# Altium PCB npm1300_qeaa_config3.PcbDoc
Units mm, origin at the board's own origin, x right, y up, seen from the top; angles counter-clockwise.
Board outline 16.75 x 14 mm, 4 copper layers (Top Layer, Mid-Layer 1, Mid-Layer 2, Bottom Layer), stack 1.592 mm thick; 8 components, 15 nets, 47 pads, 52 vias.
Unrouted connection lines stored in the file: 20.
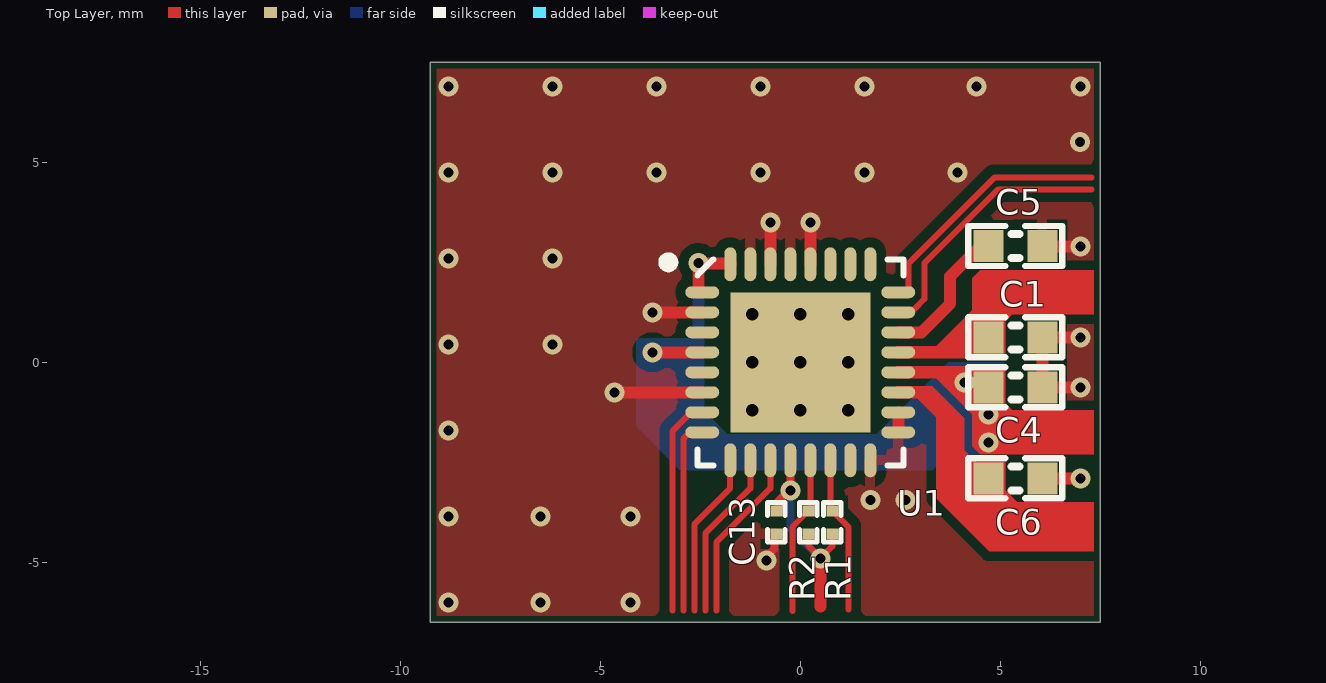
[diagram p0: Top Layer view]
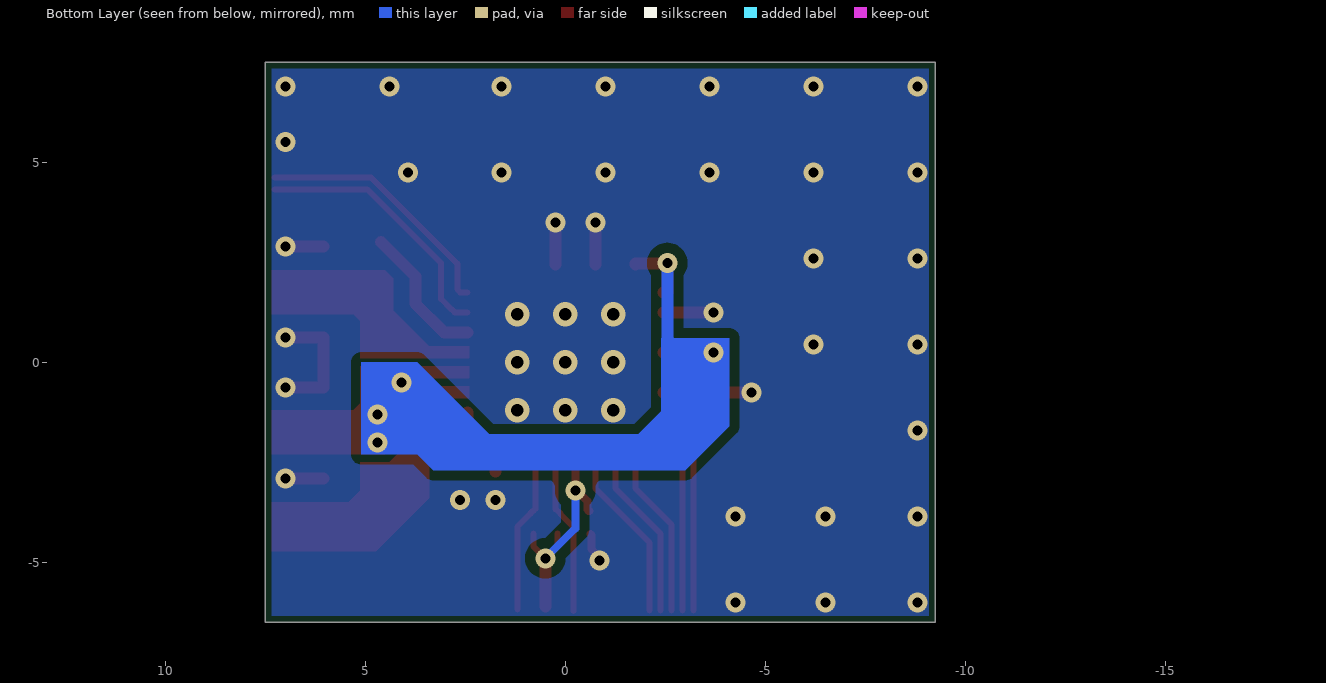
[diagram p1: Bottom Layer view, seen from below]
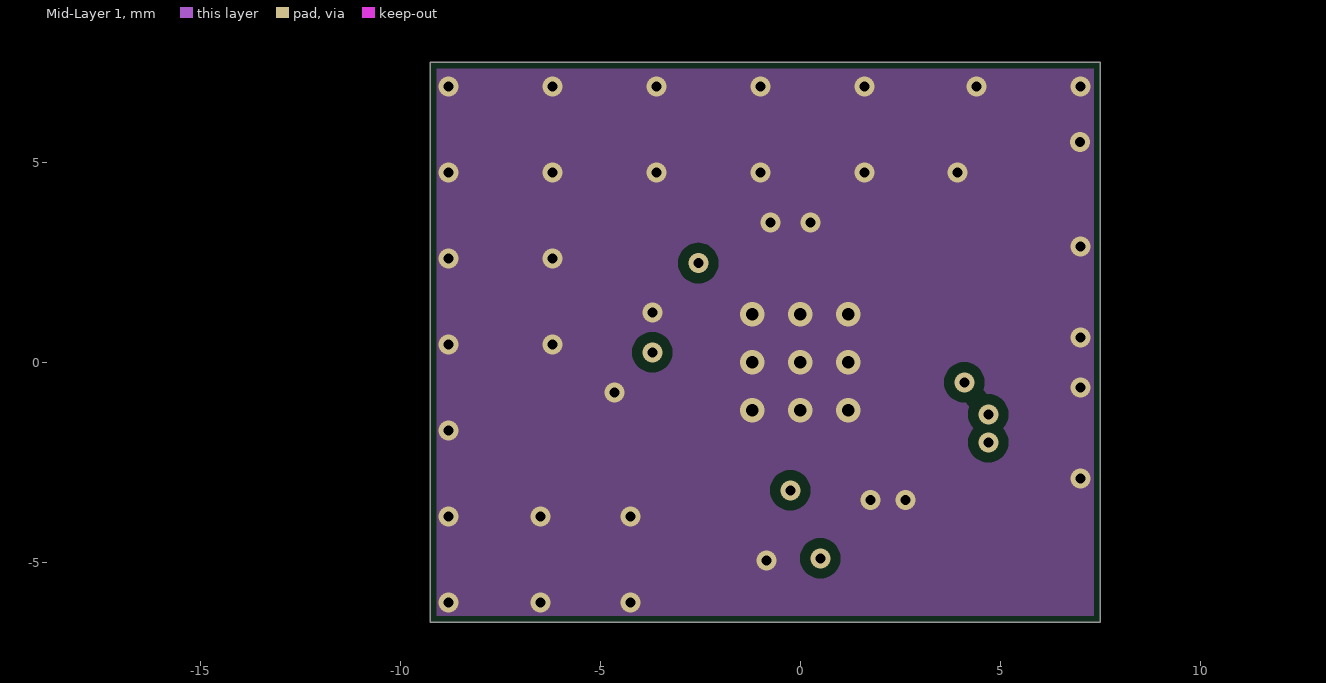
[diagram p2: Mid-Layer 1]
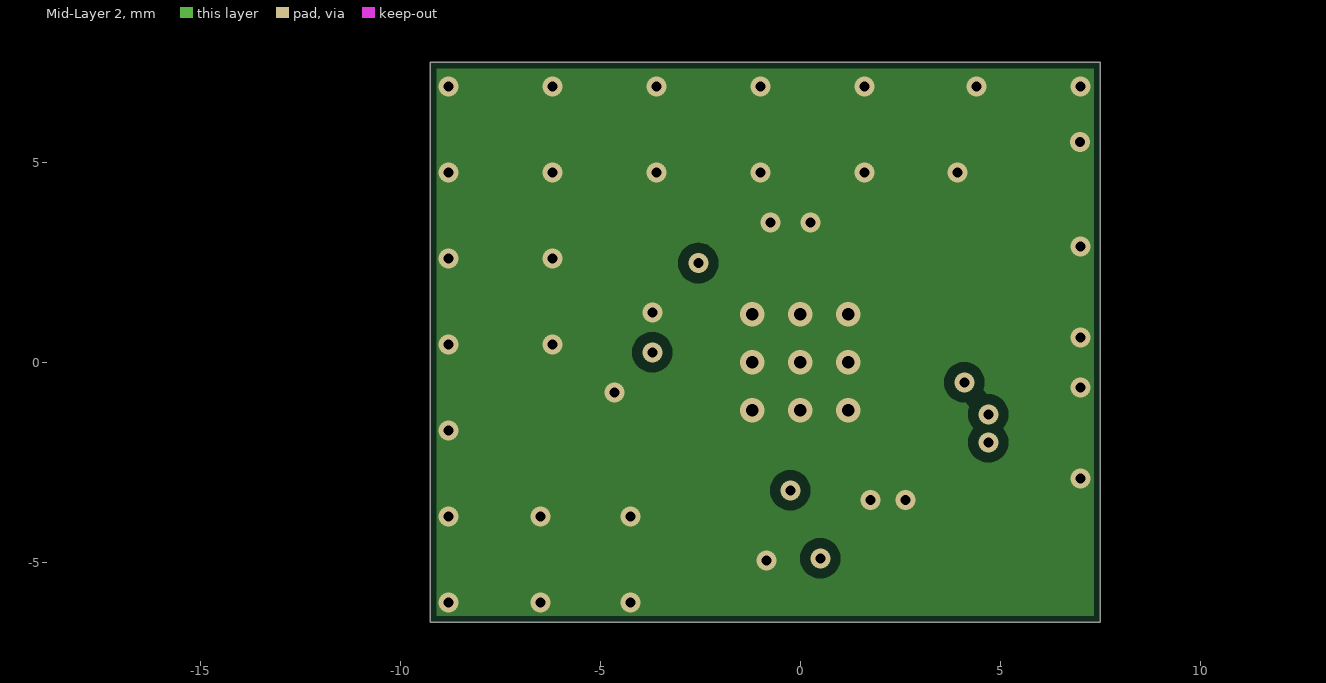
[diagram p3: Mid-Layer 2]
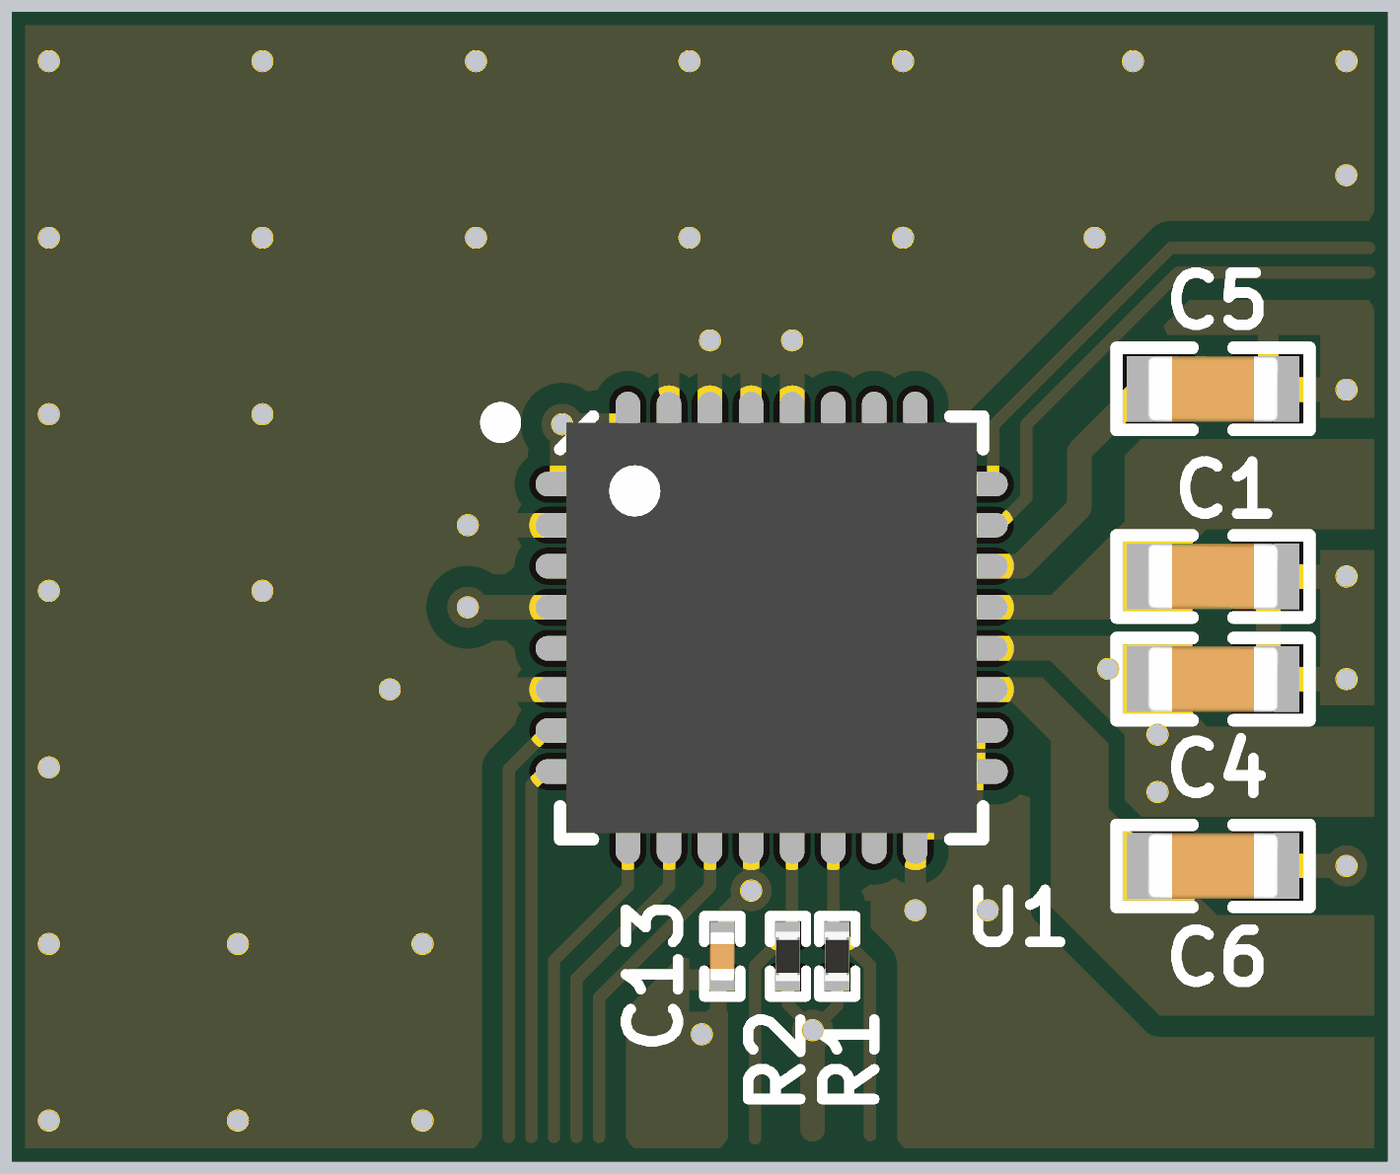
[diagram p4: 3D render of the assembled board from above, using the file's embedded part models]

## Layer stack, top to bottom
Top Solder: solder mask 0.0102, Solder Resist, Dk 3.5
Top Layer: signal copper 0.0356
Dielectric1: prepreg 0.075, FR-4, Dk 4.8
Mid-Layer 1: signal copper 0.0356
Dielectric2: core 1.3, FR-4, Dk 4.8
Mid-Layer 2: signal copper 0.0356
Dielectric 2: prepreg 0.075, FR-4, Dk 4.8
Bottom Layer: signal copper 0.0356
Bottom Solder: solder mask 0.0102, Solder Resist, Dk 3.5

## Board outline
-9.25,7.5 -9.25,-6.5 7.5,-6.5 7.5,7.5

## Design rules (kind name [scope] priority, off if disabled: settings)
BoardOutlineClearance [All] p1: gap=0.15 ignorepadtopadclearanceinfootprint=FALSE
Clearance Polygon_Clearance [(InNamedPolygon('Top_Layer-GND')) or (InNamedPolygon('Bottom_Layer-GND')) or (InNamedPolygon('Mid_Layer_1-GND')) or (InNamedPolygon('Mid_Layer_2-GND'))] p1: gap=0.254 ignorepadtopadclearanceinfootprint=FALSE except(0: Arc-Hole Track-Hole SMDPad-Hole THPad-Hole Via-Hole Fill-Hole Poly-Hole Region-Hole Text-Hole)
Clearance Clearance_Microvia [AsMM(ViaDiameter) = 0.3 vs AsMM(ViaDiameter) = 0.3] p2: gap=0.1 ignorepadtopadclearanceinfootprint=FALSE except(0: Arc-Hole Track-Hole)
Clearance ANT_Clerance [InNet('ANT')] p3: gap=0.127 ignorepadtopadclearanceinfootprint=FALSE except(0: Arc-Hole Track-Hole SMDPad-Hole THPad-Hole Via-Hole Fill-Hole Poly-Hole Region-Hole Text-Hole)
Clearance [All] p4: gap=0.125 ignorepadtopadclearanceinfootprint=FALSE
ComponentClearance [All] p1 off: gap=0.254 collisioncheckmode=3 verticalgap=0.254 showdistances=FALSE
DiffPairsRouting [All] p1: maxlimit=0.15 minlimit=0.127 mostfreqgap=0.15 toplayer_mingap=0.15 toplayer_minwidth=0.15 toplayer_maxwidth=0.15 toplayer_prefwidth=0.15 bottomlayer_mingap=0.15 bottomlayer_minwidth=0.15 bottomlayer_maxwidth=0.15 bottomlayer_prefwidth=0.15 impedanceprofiledriven=TRUE impedanceprofileid={DBD80B30-E3CF-4860-A6C7-45E32F93C55D} impedanceprofilevalue=90.000000 maxuncoupledlength=12.7
FabricationTestPointUsage TestPointUsage [All] p1: valid=0 allowmultiple=FALSE
FabricationTestpoint Testpoint [All] p1: side=3 testpointundercomponent=TRUE minsize=1.016 maxsize=2.54 preferedsize=1.524 minholesize=0 maxholesize=1.016 preferedholesize=0.813 testpointgrid=0.025 allowsidetop=TRUE allowsidebottom=TRUE usegrid=TRUE gridtolerance=0
Height [All] p1 off: minheight=0 maxheight=25.4 prefheight=12.7
HoleSize [All] p1: absolutevalues=TRUE maxlimit=5 minlimit=0.1 maxpercent=80.000 minpercent=20.000
MinimumAnnularRing [All] p1 off: minimumring=0.75
PolygonConnect PolygonConnect_GND [InNet('GND')] p1: thpad.connectstyle=Relief thpad.reliefconductorwidth=0.254 thpad.reliefentries=4 thpad.polygonreliefangle="90 Angle" thpad.airgapwidth=0.254 smdpad.connectstyle=Relief smdpad.reliefconductorwidth=0.254 smdpad.reliefentries=4 smdpad.polygonreliefangle="90 Angle" smdpad.airgapwidth=0.254 via.connectstyle=Direct via.reliefconductorwidth=0.254 via.reliefentries=4 via.polygonreliefangle="90 Angle" via.airgapwidth=0.254
PolygonConnect [All] p2: connectstyle=Direct reliefconductorwidth=0.254 reliefentries=4 polygonreliefangle="90 Angle" airgapwidth=0.254
RoutingVias [All] p1: holewidth=0.305 width=0.61 viastyle="Through Hole" minholewidth=0.305 minwidth=0.61 maxholewidth=0.711 maxwidth=1.27 useviatemplates=TRUE viatemplateguid#1={6F225C6A-EE86-4657-A426-C9A0349870D4} viatemplatename#1=v50h25m0mx0
ShortCircuit ShortCircuit_PVSS [InNet('PVSS1') or InNet('PVSS2') vs InNet('GND')] p1: allowed=TRUE
ShortCircuit [All] p2: allowed=FALSE
SilkToSolderMaskClearance SilkscreenOverComponentPads [IsPad] p1: minsilkscreentomaskgap=0.254 clearancetoexposedcopper=TRUE
SolderMaskExpansion SolderMaskExpansion_Vias [IsVia] p1: expansion=0.102 istentingtop=TRUE
SolderMaskExpansion [All] p2: expansion=0.076 istentingtop=FALSE
SupplyNets "Schematic Supply Nets_4" [InNet('VBAT')] p1: voltage=0.000
SupplyNets "Schematic Supply Nets_3" [InNet('GND')] p2: voltage=0.000
SupplyNets "Schematic Supply Nets_2" [InNet('VSYS')] p3: voltage=0.000
SupplyNets "Schematic Supply Nets_1" [InNet('VDDIO')] p4: voltage=0.000
SupplyNets "Schematic Supply Nets" [InNet('VBUSIN')] p5: voltage=0.000
UnRoutedNet [All] p1: checkbadconnections=TRUE
Width [All] p1: maxlimit=2 minlimit=0.12 preferedwidth=0.3
21 further rules are at their usual default settings.

## Components (designator, comment, footprint, x,y, rotation, side; value= is the part's Value field where it differs from the comment)
C1 "1.0µF" CAPC1608X06L 5.375,0.625 r180 top
C4 "10µF" CAPC1608X06L 5.375,-0.625 r180 top
C5 "1.0µF" CAPC1608X06L 5.375,2.91 r180 top
C6 "2.2µF" CAPC1608X06L 5.375,-2.9 r180 top
C13 "100nF" CAPC0603X03L_C -0.6,-4 r270 top
R1 "10k" RESC0603X03L_C 0.8,-4 r270 top
R2 "10k" RESC0603X03L_C 0.2,-4 r270 top
U1 "nPM1300-QEAA" Nordic_QFN50P500X500X90-33N 0,0 r0 top locked

## Footprints (in the part's own frame and the unit in brackets; to place one, negate y for a bottom-side part, rotate by r counter-clockwise, add the part's x,y. Pads: shape width x height; smd on the part's side, far side on the other; paste and mask are expansions set on the pad)
CAPC0603X03L_C [mm] "Chip Capacitor, 2-Leads, Body 0.6x0.3mm, IPC High Density"
  rect 0.27x0.3 smd mask+0.05: 1(-0.285,0) 2(0.285,0)
  silkscreen extent -0.49,-0.22 0.49,0.22, body extent -0.3,-0.15 0.3,0.15, height 0.3
CAPC1608X06L [mm] "Chip Capacitor, 2-Leads, Body 1.6x0.8mm, IPC High Density"
  rect 0.75x0.8 smd: 1(-0.675,0) 2(0.675,0)
  silkscreen extent -1.17,-0.5 1.17,0.5, body extent -0.8,-0.4 0.8,0.4, height 0.8
Nordic_QFN50P500X500X90-33N [mm] "QFN32 5x5x0.85mm, 0.5mm pitch - Medium Density"
  oval 0.85x0.3 smd mask+0.076: 1(-2.45,1.75) 2(-2.45,1.25) 3(-2.45,0.75) 4(-2.45,0.25) 5(-2.45,-0.25) 6(-2.45,-0.75) 7(-2.45,-1.25) 8(-2.45,-1.75) 17(2.45,-1.75) 18(2.45,-1.25) 19(2.45,-0.75) 20(2.45,-0.25) 21(2.45,0.25) 22(2.45,0.75) 23(2.45,1.25) 24(2.45,1.75)
  oval 0.3x0.85 smd mask+0.076: 9(-1.75,-2.45) 10(-1.25,-2.45) 11(-0.75,-2.45) 12(-0.25,-2.45) 13(0.25,-2.45) 14(0.75,-2.45) 15(1.25,-2.45) 16(1.75,-2.45) 25(1.75,2.45) 26(1.25,2.45) 27(0.75,2.45) 28(0.25,2.45) 29(-0.25,2.45) 30(-0.75,2.45) 31(-1.25,2.45) 32(-1.75,2.45)
  rect 3.5x3.5 smd: 33(0,0)
  silkscreen extent -3.42,-2.57 2.57,2.62, body extent -2.5,-2.5 2.5,2.5, height 0.9
RESC0603X03L_C [mm] "Chip Resistor, 2-Leads, Body 0.6x0.3mm, IPC High Density"
  rect 0.27x0.3 smd: 1(-0.285,0) 2(0.285,0)
  silkscreen extent -0.49,-0.22 0.49,0.22, body extent -0.3,-0.15 0.3,0.15, height 0.23

## Part data
C1 C5: library part C0603-1µ0-10V-X5R, "Capacitor, Ceramic, 1.0µF 10V X5R 0603,±10%", Manufacturer=N.A., Part number NEMS=100200528, Artikkelnr Noca=N.A., Author=getr, Component Class=Capacitors, Component Status=Active, ComponentLink1Description=Datasheet, ComponentLink1URL=N.A., ComponentLink2Description="Supplier link", ComponentLink2URL=N.A., Footprint Doc=0603, HelpURL=N.A., LatestRevisionDate=2022-10-06, Manufacturer Part Number=N.A., Note=10V, Pad Count=2, Part Number=C0603-1µ0-10V-X5R, Part number IPS=N.A., Part number Norautron=N.A., PartId=100200528, Published=2022-10-06, Supplier 1=N.A., Supplier 2=N.A., Supplier Part Number 1=N.A., Supplier Part Number 2=N.A.
C4: library part C0603-10µ, "Capacitor, X5R, ±20%", Manufacturer=N.A., Part number IPS=00000007785, Part number NEMS=100200275, Artikkelnr Noca=20039234, Author=rsk, Component Class=Capacitors, Component Status=Active, ComponentLink1Description=Datasheet, ComponentLink1URL=N.A., ComponentLink2Description="Supplier link", ComponentLink2URL=N.A., Footprint Doc=0603, HelpURL=N.A., LatestRevisionDate=2011-01-17, Manufacturer Part Number=N.A., Note=6.3V, Pad Count=2, Part Number=C0603-10µ, Part number Norautron=N.A., PartId=100200275, Published=2011-01-17, Supplier 1=N.A., Supplier 2=N.A., Supplier Part Number 1=N.A., Supplier Part Number 2=N.A.
C6: library part C0603-2.2µ-16V-X7R, "Capacitor, Ceramic, X7R, ±10%, 16V", Manufacturer="Taiyo Yuden", Manufacturer Part Number=EMK107BB7225KA-T, Part number IPS=N.A., Part number NEMS=100200439, Supplier Part Number 1=587-5835-2-ND, Artikkelnr Noca=N.A., Author=rsk, Component Class=Capacitors, Component Status=Active, ComponentLink1Description=Datasheet, ComponentLink1URL=https://ds.yuden.co.jp/TYCOMPAS/ut/specSheet?pn=EMK107BB7225KA-T, ComponentLink2Description="Supplier link", ComponentLink2URL=https://ds.yuden.co.jp/TYCOMPAS/ut/detail?pn=EMK107BB7225KA-T&u=M, Footprint Doc=0603, HelpURL=https://www.digikey.no/product-detail/en/taiyo-yuden/EMK107BB7225KA-T/587-5835-2-ND/4970646, LatestRevisionDate=2020-10-13, Note=16V, Pad Count=2, Part Number=C0603-2.2µ-16V-X7R, Part number Norautron=N.A., PartId=100200439, Published=2020-02-03, Supplier 1=Digi-Key, Supplier 2=N.A., Supplier Part Number 2=N.A.
C13: library part C0201-100n, "Capacitor, X5R, ±10%, 100nF, 16V", Manufacturer=N.A., Part number IPS="00000001248, 00000002505", Part number NEMS=100200078, Part number Norautron=262071862, Artikkelnr Noca=N.A., Author=rsk, Component Class=Capacitors, Component Status=Active, ComponentLink1Description=Datasheet, ComponentLink1URL=N.A., ComponentLink2Description="Supplier link", ComponentLink2URL=N.A., Footprint Doc=0201, HelpURL=N.A., LatestRevisionDate=2024-06-27, Manufacturer Part Number=N.A., Note=16V, Pad Count=2, Part Number=C0201-100n, PartId=100200078, Published=2014-11-13, Supplier 1=N.A., Supplier 2=N.A., Supplier Part Number 1=N.A., Supplier Part Number 2=N.A.
R1 R2: library part R0201-10k, "Resistor, ±1%, 0.05W", Manufacturer=N.A., Part number IPS=00000001255, Part number NEMS=100100065, Part number Norautron=26107101, Artikkelnr Noca=N.A., Author=rsk, Component Class=Resistors, Component Status=Active, ComponentLink1Description=Datasheet, ComponentLink1URL=N.A., ComponentLink2Description="Supplier link", ComponentLink2URL=N.A., Footprint Doc=0201, HelpURL=N.A., LatestRevisionDate=2014-11-13, Manufacturer Part Number=N.A., Note="Chip Res 1%", Pad Count=2, Part Number=R0201-10k, PartId=100100065, Published=2014-11-13, Supplier 1=N.A., Supplier 2=N.A., Supplier Part Number 1=N.A., Supplier Part Number 2=N.A.
U1: "Li-Ion/Li-Polymer USB-C battery charger with high efficiency buck regulators, LDOs or load switches, LED drivers, TWI and VBUSOUT", Manufacturer="Nordic Semiconductor", Part number IPS=N.A., Part number NEMS=102000252, Artikkelnr Noca=N.A., Author=eisk, Component Class=nRF_Devices, Component Status=Active, ComponentLink1Description=Datasheet, ComponentLink1URL=N.A., ComponentLink2Description="Supplier link", ComponentLink2URL=N.A., Footprint Doc=QFN-32, HelpURL=N.A., LatestRevisionDate=2022-11-14, Manufacturer Part Number=nPM1300-QEAA, Note=N.A., Pad Count=33, Part Number=nPM1300-QEAA, Part number Norautron=N.A., PartId=102000252, Published=2022-02-17, Supplier 1="Nordic Semiconductor", Supplier 2=N.A., Supplier Part Number 1=nPM1300-QEAA, Supplier Part Number 2=N.A.

## Via types
v1: diameter 0.5, hole 0.25, Top Layer to Bottom Layer, tented both sides, 43 vias
v2: diameter 0.61, hole 0.305, Top Layer to Bottom Layer, tented both sides, 9 vias

## Nets (pads, with @x,y where several pads share a name; then routed paths per layer and width w, separated by ;. In a path a pad name is that pad's centre, name@x,y a point inside that pad or via, vN(x,y) a via of type N, cw(c..) or ccw(c..) an arc to the next point about the centre after c; other vN are vias at no path point)
CC1: U1.23 | length 6.6
  Top Layer w0.15: U1.23 2.766,1.25 2.841,1.325 2.846,1.325 3.104,1.583 3.104,2.478 4.951,4.325 7.275,4.325
CC2: U1.24 | length 6.4
  Top Layer w0.15: U1.24 2.631,1.75 2.7,1.819 2.7,2.463 4.862,4.625 7.275,4.625
GND: C1.1 C4.1 C5.1 C6.1 C13.2 U1.2 U1.6 U1.16 U1.17 U1.18 U1.28 U1.29 U1.30 U1.31 U1.33 | length 11.3
  Top Layer w0.2: v1(-0.85,-4.95) -0.85,-4.869 -0.65,-4.669 -0.65,-4.315 C13.2@-0.627,-4.292
  Top Layer w0.3: v1(-4.65,-0.75) U1.6 ; v1(-3.7,1.25) U1.2 ; U1.30 v1(-0.75,3.5) ; U1.28 v1(0.25,3.5) ; U1.16@1.75,-2.725 U1.16 ; U1.17 U1.18 ; C6.1 v1@6.9,-2.9 ; C4.1 C1.1 v1@6.8,0.625 ; C5.1@6.05,2.9 v1@6.8,2.9 ; C4.1@6.125,-0.625 v1@6.8,-0.625
  other v1: -8.8,-6 -6.5,-6 -4.25,-6 -8.8,-3.85 -6.5,-3.85 -4.25,-3.85 1.75,-3.44 2.631,-3.44 7,-2.9 -8.8,-1.7 7,-0.625 -8.8,0.45 -6.2,0.45 7,0.625 -8.8,2.6 -6.2,2.6 7,2.9 -8.8,4.75 -6.2,4.75 -3.6,4.75 -1,4.75 1.6,4.75 3.933,4.75 6.997,5.512 -8.8,6.9 -6.2,6.9 -3.6,6.9 -1,6.9 1.6,6.9 4.4,6.9 7,6.9
  other v2: -1.2,-1.2 0,-1.2 1.2,-1.2 -1.2,0 0,0 1.2,0 -1.2,1.2 0,1.2 1.2,1.2
GPIO0: U1.7 | length 5.4
  Top Layer w0.15: -3.2,-6.2 -3.2,-1.725 -2.725,-1.25 U1.7
GPIO1: U1.8 | length 4.8
  Top Layer w0.15: -2.925,-6.2 -2.925,-1.913 -2.762,-1.75 U1.8
GPIO2: U1.9 | length 4.1
  Top Layer w0.15: -2.65,-6.2 -2.65,-4.05 -1.753,-3.153 -1.753,-2.453 U1.9
GPIO3: U1.10 | length 4.2
  Top Layer w0.15: -2.375,-6.2 -2.375,-4.275 -1.25,-3.15 U1.10
GPIO4: U1.11 | length 4.3
  Top Layer w0.15: -2.1,-6.2 -2.1,-4.5 -0.75,-3.15 U1.11
NetC5_2: C5.2 U1.22 | length 3.5
  Top Layer w0.3: U1.22 3.033,0.75 3.748,1.465 3.748,2.148 C5.2@4.613,3.013
SCL: R1.1 U1.14 | length 3.9
  Top Layer w0.15: U1.14 0.75,-3.665 R1.1 0.815,-3.715 0.875,-3.775 0.875,-3.79 1.2,-4.115 1.2,-6.178
SDA: R2.1 U1.13 | length 4
  Top Layer w0.15: -0.2,-6.216 -0.2,-4.117 0.125,-3.792 0.125,-3.775 0.22,-3.68 0.25,-3.68 U1.13
VBAT: C6.2 U1.19
VBUSIN: C1.2 U1.21
VDDIO: C13.1 R1.2 R2.2 U1.12 | length 6.2
  Top Layer w0.15: R2.2 0.2,-4.586 v1@0.45,-4.836 ; v1@0.5,-4.786 v1(0.5,-4.9) 0.8,-4.6 R1.2
  Top Layer w0.2: C13.1 -0.585,-3.715 -0.55,-3.68 -0.55,-3.467 -0.283,-3.2 v1(-0.25,-3.2) -0.25,-3 U1.12
  Top Layer w0.3: 0.5,-6.106 v1(0.5,-4.9)
  Bottom Layer w0.2: v1(-0.25,-3.2) -0.25,-4.15 v1(0.5,-4.9)
VSYS: C4.2 U1.1 U1.4 U1.20 U1.32 | length 6.1
  Top Layer w0.3: v1(-3.7,0.25) U1.4 ; U1.1 -2.55,1.75 v1(-2.55,2.478) -2.536,2.464 -1.75,2.464 U1.32
  Bottom Layer w0.3: v1(-3.7,0.25) -2.875,0.25 -2.55,0.575 v1(-2.55,2.478)
  other v1: 4.7,-2 4.7,-1.3 4.1,-0.5
pads on no net: U1.3 U1.5 U1.15 U1.25 U1.26 U1.27

## Polygon pours and split planes (outlines as drawn)
GND on Mid-Layer 1 "Mid_Layer_1-GND" (solid, remove dead copper, pour order 24): -9.25,-6.5 7.5,-6.5 7.5,7.5 -9.25,7.5
GND on Mid-Layer 2 "Mid_Layer_2-GND" (solid, remove dead copper, pour order 25): -9.25,-6.5 7.5,-6.5 7.5,7.5 -9.25,7.5
GND on Bottom Layer "Bottom_Layer-GND" (solid, remove dead copper, pour order 26): -9.25,-6.5 7.5,-6.5 7.5,7.5 -9.25,7.5
GND on Top Layer "Top_Layer-GND" (solid, remove dead copper, pour order 21): -9.25,-6.5 7.5,-6.5 7.5,7.5 -9.25,7.5

## Other copper
Top Layer:
  region net VBUSIN: 5.125,0.1 5.125,1.025 5.3,1.2 7.338,1.2 7.338,2.3 4.5,2.3 4.3,2.1 4.3,1.3 3.4,0.4 2.4,0.4 2.4,0.1
  region net VSYS: 5.125,-0.1 5.125,-1.025 5.3,-1.2 7.338,-1.2 7.338,-2.3 4.5,-2.3 4.3,-2.1 4.3,-1.3 3.4,-0.4 2.4,-0.4 2.4,-0.1
  region net VBAT: 2.4,-0.9 2.925,-0.9 3.4,-1.375 3.4,-3.4 4.725,-4.725 7.338,-4.725 7.338,-3.5 5.425,-3.5 5.125,-3.2 5.125,-2.5 4.4,-2.5 4.1,-2.2 4.1,-1.4 3.3,-0.6 2.4,-0.6
  pour cut-out: -1.85,1.85 1.85,1.85 1.85,-1.85 -1.85,-1.85
  pour cut-out: -17.9,1.7 -17.9,-3.2
  pour cut-out: 7.375,0.45 7.375,-0.41
Mid-Layer 1:
  pour cut-out: 11.025,5.525 12.025,5.525
Bottom Layer:
  region net VSYS: -4.1,0.6 -4.1,-1.6 -3,-2.7 3.3,-2.7 3.7,-2.3 5.1,-2.3 5.1,0 3.7,0 1.9,-1.8 -1.825,-1.8 -2.4,-1.225 -2.4,0.6

## Silkscreen, mask and mechanical layers (free items; w line width, h text height)
Board Outline:
  the board outline again, w0.2

## Dimensions
7.5,-6.5 to 7.5,7.5 on Dimension
-9.25,-6.5 to 7.5,-6.5 on Dimension